# Altium PCB PCB1.PcbDoc
Units mm, origin at the board's own origin, x right, y up, seen from the top; angles counter-clockwise.
Board outline 91.5 x 139.5 mm, 2 copper layers (Top Layer, Bottom Layer); 69 components, 86 nets, 298 pads, 10 vias.
Unrouted connection lines stored in the file: 40.
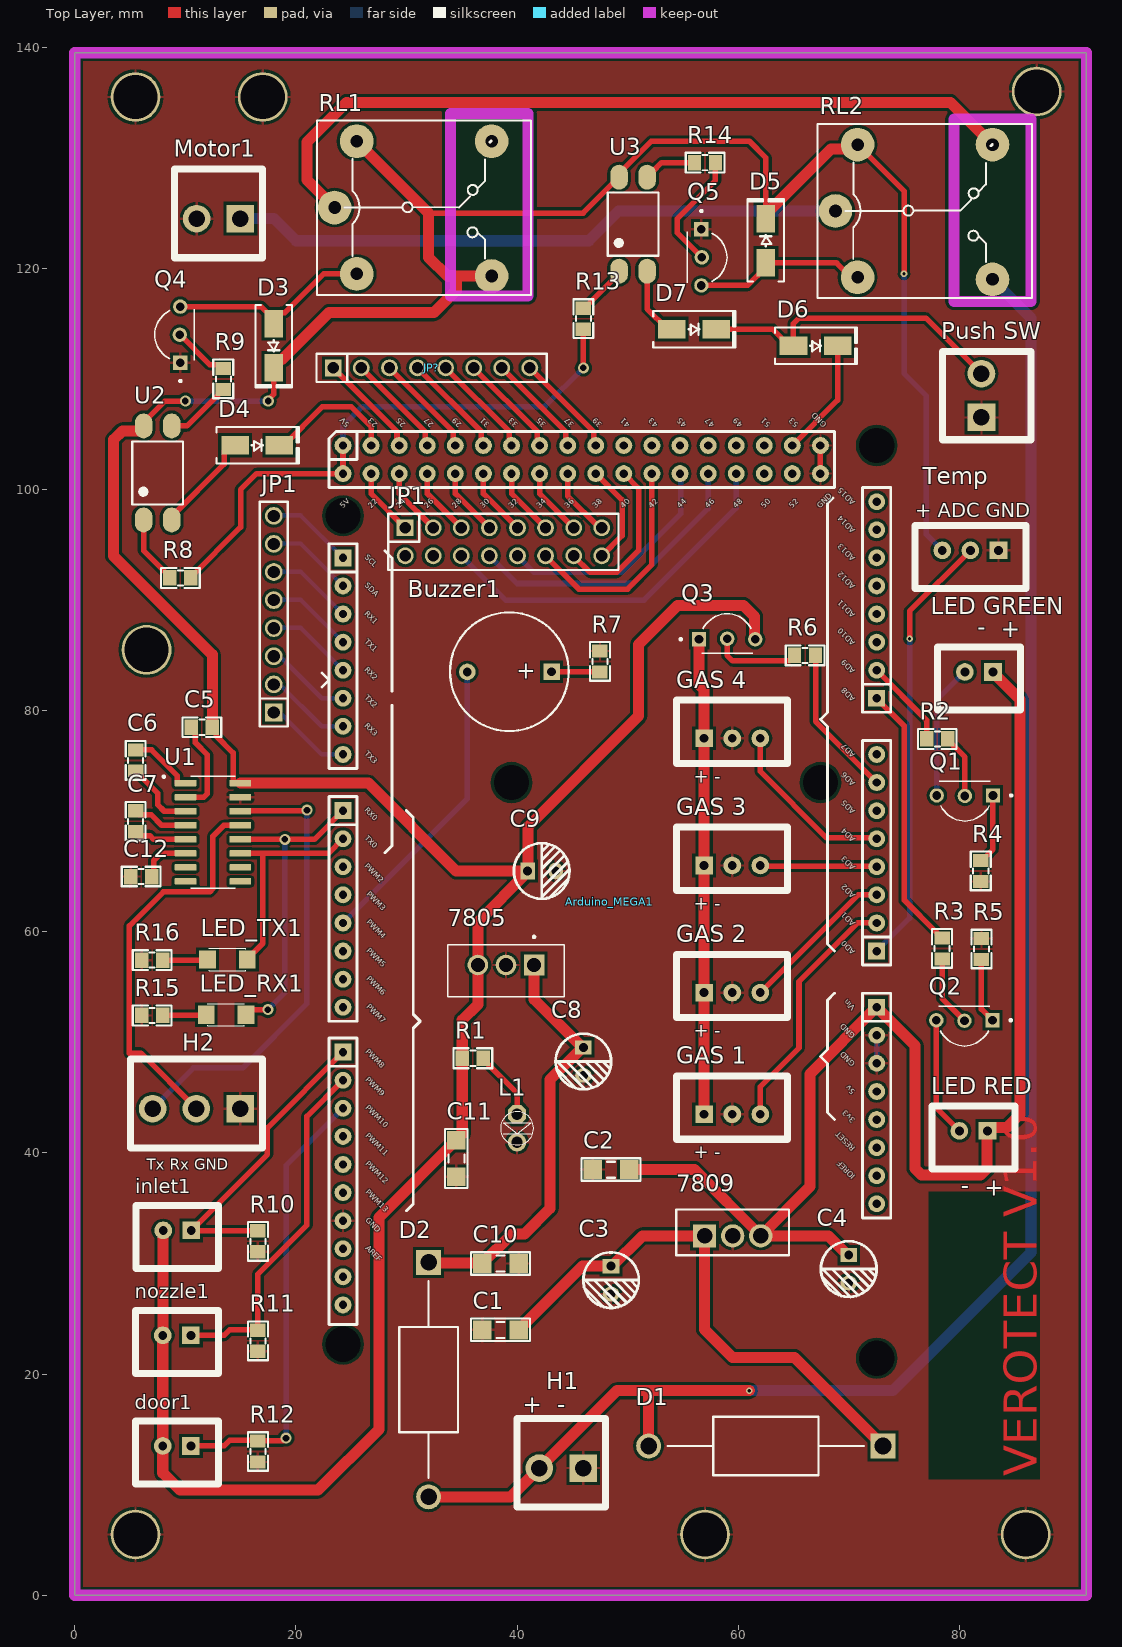
[diagram p0: Top Layer view]
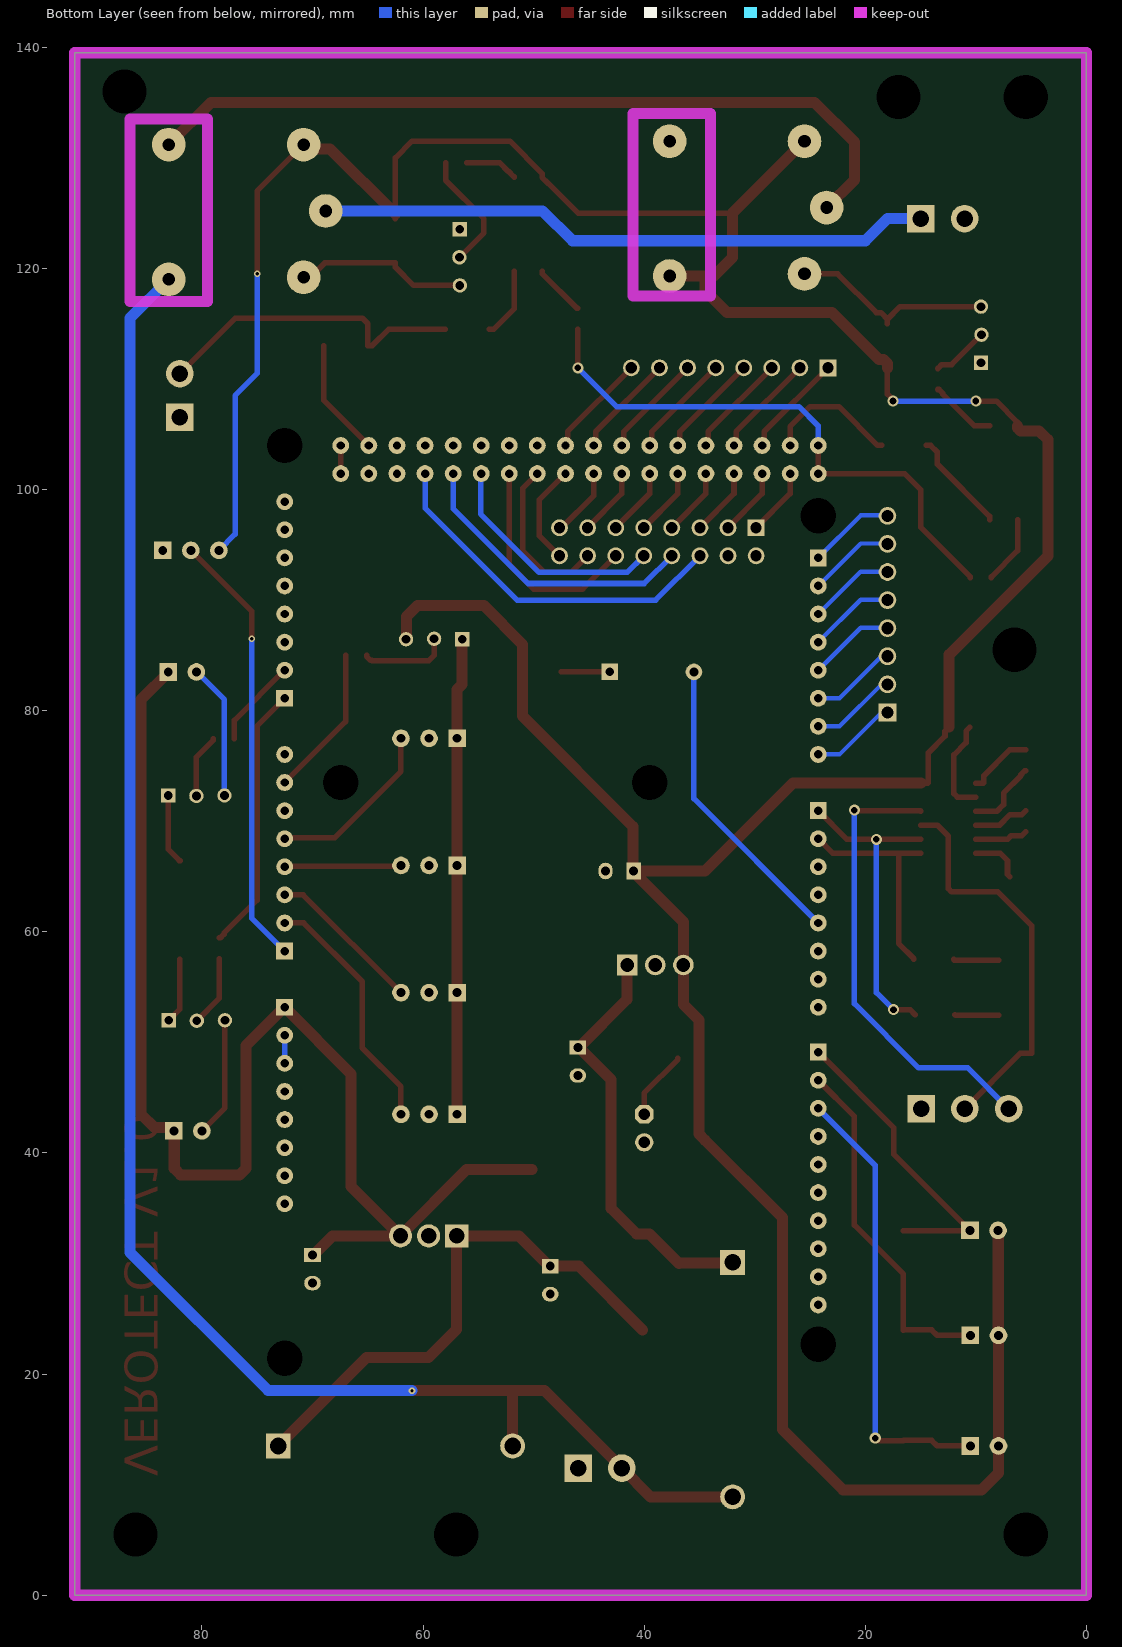
[diagram p1: Bottom Layer view, seen from below]

## Layer stack, top to bottom
Top Solder: solder mask 0.0102, Solder Resist, Dk 3.5
Top Layer: signal copper 0.0356
Dielectric 1: dielectric 0.32, FR-4, Dk 4.8
Bottom Layer: signal copper 0.0356
Bottom Solder: solder mask 0.0102, Solder Resist, Dk 3.5

## Board outline
0,0 91.5,0 91.5,139.5 0,139.5

## Design rules (kind name [scope] priority, off if disabled: settings)
Clearance [All] p1: gap=0.254 ignorepadtopadclearanceinfootprint=FALSE except(0: Arc-Hole Track-Hole SMDPad-Hole THPad-Hole Via-Hole Fill-Hole Poly-Hole Region-Hole Text-Hole)
PolygonConnect [All] p1: connectstyle=Relief reliefconductorwidth=0.254 reliefentries=4 polygonreliefangle="90 Angle" airgapwidth=0.254
RoutingVias [All] p1: holewidth=0.3 width=0.6 viastyle="Through Hole" minholewidth=0.3 minwidth=0.5 maxholewidth=0.6 maxwidth=1
SolderMaskExpansion [All] p1: expansion=0.102 istentingtop=FALSE
Width [All] p1: maxlimit=1 minlimit=0.3 preferedwidth=0.5
30 further rules are at their usual default settings.

## Components (designator, comment, footprint, x,y, rotation, side; value= is the part's Value field where it differs from the comment)
7805 "LM7805CT/NOPB" TO254P1054X470X1955-3 39,57 r180 top
7809 "LM7809CT" TO254P470X1016X1879-3P 56.96,32.5 r90 top
Arduino_MEGA1 "Arduino_MEGA?" ArduinoMEGA_ALL 75.06,7.46 r90 top
Buzzer1 "Coi Chip Speaker" "Coi Chip Speacker" 43.12,83.513 r180 top
C1 "104" "tu 1206" 38.5,24 r180 top
C2 "104" "tu 1206" 48.5,38.5 r180 top
C3 "100uF" "tu hoa 5mm" 48.5,28.5 r270 top
C4 "100uF" "tu hoa 5mm" 70,29.5 r270 top
C5 "105" "tu 0805" 11.5,78.5 r180 top
C6 "105" "tu 0805" 5.5,75.5 r270 top
C7 "105" "tu 0805" 5.5,70 r270 top
C8 "100uF" "tu hoa 5mm" 46,48.27 r270 top
C9 "100uF" "tu hoa 5mm" 42.23,65.5 r0 top
C10 "104" "tu 1206" 38.5,30 r0 top
C11 "104" "tu 1206" 34.5,39.5 r270 top
C12 "105" "tu 0805" 6,65 r0 top
D1 "1N5822" DIOAD2120W130L950D530P 62.5,13.5 r180 top
D2 "1N5822" DIOAD2120W130L950D530P 32,19.5 r270 top
D3 "M7" "DIODE SMA" 18,113 r270 top
D4 "M7" "DIODE SMA" 16.5,104 r0 top
D5 "M7" "DIODE SMA" 62.5,122.5 r90 top
D6 "M7" "DIODE SMA" 67,113 r0 top
D7 "M7" "DIODE SMA" 56,114.5 r0 top
door1 "Door" XH2.54M-2 10.5,13.5 r180 top
"GAS 1" "Gas Sensor 1" XH2.54M-3 56.92,43.5 r0 top
"GAS 2" "Gas Sensor 3" XH2.54M-3 56.92,54.5 r0 top
"GAS 3" "Gas Sensor 2" XH2.54M-3 56.92,66 r0 top
"GAS 4" "Gas Sensor 4" XH2.54M-3 56.92,77.5 r0 top
H1 "Power 12V" VH3.96M-2 44,11.5 r180 top
H2 "RS232 Out" VH3.96M-3 12.98,44 r180 top
inlet1 "Inlet" XH2.54M-2 10.54,33 r180 top
JP1 "JP 2x8 2.54" "JP 2x8 CT" 38.77,95.27 r0 top
JP1 "JP 1x8 2.54" "JP 1x8 DT" 18,79.84 r90 top
JP? "JP 1x8 2.54" "JP 1x8 CT" 23.38,111 r0 top
L1 "LED 3mm" LED-3MM-RED 40,43.5 r270 top
"LED GREEN" "Led GREEN" XH2.54M-2 83.04,83.5 r180 top
"LED RED" "Led RED" XH2.54M-2 82.54,42 r180 top
LED_RX1 "LED 0805" LED-1206-Red 15.5,52.5 r180 top
LED_TX1 "LED 0805" LED-1206-Red 15.607,57.5 r180 top
Motor1 "motor" VH3.96M-2 13,124.5 r180 top
nozzle1 "Nozzle" XH2.54M-2 10.5,23.5 r180 top
"Push SW" "Header 2P VH3.96 Duc Thang" VH3.96M-2 82,108.5 r90 top
Q1 "2N2222A" TO92254P470H750-3 80.5,70 r180 top
Q2 "2N2222A" TO92254P470H750-3 80.46,49.67 r180 top
Q3 "2N2222A" TO92254P470H750-3 59,88.786 r0 top
Q4 "2N2222A" TO92254P470H750-3 7.214,114 r90 top
Q5 "2N2222A" TO92254P470H750-3 59,121 r270 top
R1 "3.3k" "tro smd 0805" 36,48.5 r180 top
R2 "4.7k" "tro smd 0805" 78,77.5 r0 top
R3 "4.7k" "tro smd 0805" 78.5,58.5 r270 top
R4 "3.3k" "tro smd 0805" 82,65.5 r270 top
R5 "3.3k" "tro smd 0805" 81.939,58.446 r90 top
R6 "3.3k" "tro smd 0805" 66.054,84.939 r180 top
R7 "3.3k" "tro smd 0805" 47.561,84.454 r270 top
R8 "3.3k" "tro smd 0805" 9.546,92.061 r0 top
R9 "3.3k" "tro smd 0805" 13.5,110 r270 top
R10 "10k" "tro smd 0805" 16.5,32 r90 top
R11 "10k" "tro smd 0805" 16.5,23 r90 top
R12 "10k" "tro smd 0805" 16.5,13 r90 top
R13 "3.3k" "tro smd 0805" 46.061,115.454 r270 top
R14 "3.3k" "tro smd 0805" 57,129.5 r180 top
R15 "1k" "tro smd 0805" 7,52.5 r0 top
R16 "1k" "tro smd 0805" 7,57.5 r0 top
RL1 "Relay" "Relay 5 Chan SRD" 23.5,125.5 r0 top
RL2 "Relay" "Relay 5 Chan SRD" 68.8,125.192 r0 top
Temp "LM35 cam bien nhiet do" XH2.54M-3 83.54,94.5 r180 top (schematic designator "Temperature Header1")
U1 "MAX232ESE+" SOIC127P600X175-16N 12.5,69 r0 top
U2 "OPTO PC817 SMD" SOP4 7.5,101.5 r90 top value=PC817
U3 "OPTO PC817 SMD" SOP4 50.5,124 r90 top value=PC817

## Footprints (in the part's own frame and the unit in brackets; to place one, negate y for a bottom-side part, rotate by r counter-clockwise, add the part's x,y. Pads: shape width x height; smd on the part's side, far side on the other; paste and mask are expansions set on the pad)
ArduinoMEGA_ALL [mil]
  round 62.99 hole 125.98: 0(550,100) 0(600,2000) 0(2600,300) 0(2600,1400) 0(3550,2000) 0(3800,100)
  round 60 hole 30: 1(1100,100) 2(1200,100) 3(1300,100) 4(1400,100) 5(1500,100) 6(1600,100) 7(1700,100) 10(2100,100) 11(2200,100) 12(2300,100) 13(2400,100) 14(2500,100) 15(2600,100) 16(2700,100) 18(3000,100) 19(3100,100) 20(3200,100) 21(3300,100) 22(3400,100) 23(3500,100) 24(3600,100) 25(3700,300) 26(3800,300) 27(3700,400) 28(3800,400) 29(3700,500) 30(3800,500) 31(3700,600) 32(3800,600) 33(3700,700) 34(3800,700) 35(3700,800) 36(3800,800) 37(3700,900) 38(3800,900) 39(3700,1000) 40(3800,1000) 41(3700,1100) 42(3800,1100) 43(3700,1200) 44(3800,1200) 45(3700,1300) 46(3800,1300) 47(3700,1400) 48(3800,1400) 49(3700,1500) 50(3800,1500) 51(3700,1600) 52(3800,1600) 53(3700,1700) 54(3800,1700) 55(3700,1800) 56(3800,1800) 57(3700,1900) 58(3800,1900) 59(3700,2000) 60(3800,2000) 62(3300,2000) 63(3200,2000) 64(3100,2000) 65(3000,2000) 66(2900,2000) 67(2800,2000) 68(2700,2000) 70(2400,2000) 71(2300,2000) 72(2200,2000) 73(2100,2000) 74(2000,2000) 75(1900,2000) 76(1800,2000) 78(1540,2000) 79(1440,2000) 80(1340,2000) 81(1240,2000) 82(1140,2000) 83(1040,2000) 84(940,2000) 85(840,2000) 86(740,2000)
  rect 60x60 hole 30: 8(1800,100) 9(2000,100) 17(2900,100) 61(3400,2000) 69(2500,2000) 77(1640,2000)
  silkscreen extent 670,50 3850,2075, body extent 890,50 3850,2050, height 335
"Coi Chip Speacker" [mm]
  rect 1.5x1.5 hole 0.8: 1(0,0)
  round 1.5 hole 0.8: 2(7.62,0.013)
  silkscreen extent -1.55,-5.38 9.18,5.36, body extent -2.22,-6 13.24,6, height 4.5
DIOAD2120W130L950D530P [mm]
  round 2.25 hole 1.5: A(10.6,0)
  rect 2.25x2.25 / inner round 2.25 / far side rect 2.25x2.25 hole 1.5: C(-10.6,0)
  silkscreen extent -8.89,-2.65 8.89,2.65, body extent -10.61,-2.67 10.54,2.63, height 5.3
"DIODE SMA" [mm] "SMA"
  rect 2.5x1.7 smd: 1(-2,0) 2(2,0)
  silkscreen extent -3.68,-1.65 3.75,1.65, body extent -2.6,-1.37 2.6,1.37, height 2.4
"JP 1x8 CT" [mm] "8 row, straight, gold plating"
  rect 1.52x1.52 hole 1.02: 1(0,0)
  round 1.52 hole 1.02: 2(2.54,0) 3(5.08,0) 4(7.62,0) 5(10.16,0) 6(12.7,0) 7(15.24,0) 8(17.78,0)
  silkscreen extent -1.52,-1.27 19.3,1.27, body extent -1.52,-1.25 19.3,1.25, height 8.51
"JP 1x8 DT" [mm] "8 pins, 1 row, straight, gold plating"
  rect 1.6x1.6 hole 1.1: 1(0,0)
  round 1.6 hole 1.1: 2(2.54,0) 3(5.08,0) 4(7.62,0) 5(10.16,0) 6(12.7,0) 7(15.24,0) 8(17.78,0)
  silkscreen extent -1.27,-1.27 19.05,1.27, body extent -1.27,-1.27 19.05,1.27, height 8.54
"JP 2x8 CT" [mm] "16 pins, dual row, straight, gold plating"
  rect 1.52x1.52 hole 1.02: 1(-8.89,1.27)
  round 1.52 hole 1.02: 2(-6.35,1.27) 3(-3.81,1.27) 4(-1.27,1.27) 5(1.27,1.27) 6(3.81,1.27) 7(6.35,1.27) 8(8.89,1.27) 9(8.89,-1.27) 10(6.35,-1.27) 11(3.81,-1.27) 12(1.27,-1.27) 13(-1.27,-1.27) 14(-3.81,-1.27) 15(-6.35,-1.27) 16(-8.89,-1.27)
  silkscreen extent -10.41,-2.54 10.41,2.54, body extent -10.41,-2.54 10.41,2.54, height 8.51
LED-3MM-RED [mil]
  oct 65x65 hole 40: 1(0,0)
  round 65 hole 40: 2(100,0)
  silkscreen extent -9,-59 109,59, body extent -27,-77 117,80, height 181
LED-1206-Red [mil]
  rect 60x65 smd: 1(0,0) 2(142,0)
  silkscreen extent 6,-40 136,40, body extent 7,-31 133,32, height 43
"Relay 5 Chan SRD" [mil] "Relay SPDT, 5 pin, 10A,W 650mil, L 800mil, H 800mil"
  round 120 hole 45: 1(0,0) 2(559.06,236.22) 3(559.06,-243.78) 4(78.74,-236.22) 5(78.74,236.22)
  silkscreen extent -63,-311 700,310, body extent -55,-306 697,304, height 602
SOIC127P600X175-16N [mm]
  rrect25% 1.97x0.59 smd: 1(-2.475,4.445) 2(-2.475,3.175) 3(-2.475,1.905) 4(-2.475,0.635) 5(-2.475,-0.635) 6(-2.475,-1.905) 7(-2.475,-3.175) 8(-2.475,-4.445) 9(2.475,-4.445) 10(2.475,-3.175) 11(2.475,-1.905) 12(2.475,-0.635) 13(2.475,0.635) 14(2.475,1.905) 15(2.475,3.175) 16(2.475,4.445)
  silkscreen extent -4.54,-5.06 2,5.13, body extent -3,-4.95 3,4.95, height 1.75
SOP4 [mm]
  oval 2.25x1.6 smd: 1(-4.25,1.27) 2(-4.25,-1.27) 3(4.25,-1.27) 4(4.25,1.27)
  silkscreen extent -2.85,-2.3 2.85,2.3, body extent -4.67,-2.29 4.93,2.31, height 3.6
TO254P470X1016X1879-3P [mm]
  rect 2.1x2.1 hole 1.4: 1(0,0)
  round 2.1 hole 1.4: 2(0,-2.54) 3(0,-5.08)
  silkscreen extent -1.75,-7.64 2.39,2.56, body extent -1.91,-7.62 2.45,2.54, height 20.4
TO254P1054X470X1955-3 [mm]
  rect 1.86x1.86 hole 1.24: 1(-2.54,0)
  round 1.86 hole 1.24: 2(0,0) 3(2.54,0)
  silkscreen extent -5.27,-2.64 5.27,2.86, body extent -4.95,-1.65 5.21,2.54, height 22.86
TO92254P470H750-3 [mm]
  rect 1.298x1.298 / inner round 1.298 / far side rect 1.298x1.298 hole 0.79: 1(-2.54,-2.33)
  round 1.298 hole 0.79: 2(0,-2.286) 3(2.54,-2.33)
  silkscreen extent -4.29,-3.6 2.3,0, body extent -2.74,-3.47 2.74,0.13, height 7.65
"tro smd 0805" [mm]
  rect 1.2x1.4 smd: 1(-0.946,-0.061) 2(0.954,-0.061)
  silkscreen extent -1.75,-0.97 1.75,0.84, body extent -1.56,-0.76 1.44,0.64, height 0.53
"tu 0805" [mm] "Compoment SMD 80x50mil"
  rect 1.2x1.4 smd: 1(-0.946,-0.003) 2(0.954,-0.003)
  silkscreen extent -1.75,-0.89 1.75,0.89, body extent -1.01,-0.64 1.01,0.63, height 0.61
"tu 1206" [mm]
  rect 1.7x1.7 smd: 1(-1.65,0) 2(1.65,0)
  silkscreen extent -2.67,-1.02 2.67,1.02, body extent -1.57,-0.8 1.63,0.8, height 0.94
"tu hoa 5mm" [mm]
  rect 1.3x1.5 hole 0.8: 1(-1.27,0)
  oval 1.3x1.5 hole 0.8: 2(1.27,0)
  silkscreen extent -2.51,-2.51 2.51,2.51, body extent -3.12,-3.18 3.23,3.18, height 14.55
VH3.96M-2 [mm]
  rect 2.5x2.5 hole 1.5: 1(-1.98,0)
  round 2.5 hole 1.5: 2(1.98,0)
  silkscreen extent -4,-4.5 4,3.54, body extent -4.08,-4.49 3.96,3.88, height 10.26
VH3.96M-3 [mm]
  rect 2.5x2.5 hole 1.5: 1(-1.98,0)
  round 2.5 hole 1.5: 2(1.98,0) 3(5.94,0)
  silkscreen extent -4,-4.5 7.96,3.54, body extent -4.08,-4.49 7.92,3.88, height 10.26
XH2.54M-2 [mm]
  rect 1.6x1.6 hole 0.8: 1(0,0)
  round 1.6 hole 0.8: 2(2.54,0)
  silkscreen extent -2.48,-2.26 5.02,3.46, body extent -2.48,-2.26 5.02,3.48, height 6.91
XH2.54M-3 [mm]
  rect 1.6x1.6 hole 0.8: 1(0,0)
  round 1.6 hole 0.8: 2(2.54,0) 3(5.08,0)
  silkscreen extent -2.48,-2.26 7.56,3.46, body extent -2.48,-2.26 7.56,3.48, height 6.91

## Part data
7805: Package=None, Availability=Unavailable, MP=LM7805CT/NOPB, Price=None
7809: "Linear Voltage Regulator IC 1 Output 1A TO-220-3", Package="TO-220-3 Fujitsu", Availability=Unavailable, MF=Fujitsu, MP=LM7809C, Price=None, SnapEDA_Link=https://www.snapeda.com/parts/LM7809C/Fujitsu/view-part/1233224/?ref=snap
Arduino_MEGA1: library part Arduino_MEGA
Buzzer1: "Còi chip"
C1 C2 C10 C11: library part "Tu 1206 104 50V 20%", "Dán", Chung_Loai=Dán, Don_Vi=Con, Ma_Hang=MH004544, So_Chan=2, Ten_Linh_Kien="Tụ 1206 104-0.1uF 20% 50V"
C3 C4 C8 C9: library part "Tu Hoa 100uF 25V 6x11", "Cắm", Chung_Loai=Cắm, Don_Vi=Con, Ma_Hang=MH001351, So_Chan=2, Ten_Linh_Kien="Tụ Hóa 100uF 25V 6x11MM"
C5 C6 C7 C12: library part "Tu 0805 105 50V 10%", "Dán", Chung_Loai=Dán, Don_Vi=Con, Ma_Hang=MH004552, So_Chan=2, Ten_Linh_Kien="Tụ 0805 105-1uF 10% 50V"
D1 D2: "Diode Schottky 40 V 3A Through Hole DO-201AD", Package="DO-201 STMicroelectronics", Availability="In Stock", Check_prices=https://www.snapeda.com/parts/1N5822/STMicroelectronics/view-part/?ref=eda, MF=STMicroelectronics, MP=1N5822, Price=None, Purchase-URL=https://pricing.snapeda.com/search/part/1N5822/?ref=eda, SnapEDA_Link=https://www.snapeda.com/parts/1N5822/STMicroelectronics/view-part/?ref=snap
D3 D4 D5 D6 D7: library part "Diode M7 ( 4007 )", "Dán", Chung_Loai=Dán, Don_Vi=Con, Ma_Hang=MH000944, Ten_Linh_Kien="Diode M7 1N4007 SMD 1A 1000V"
door1 inlet1 "LED GREEN" "LED RED" nozzle1: library part "Header 2P 2.54 Duc Thang", "Cắm", Chung_Loai=Cắm, Don_Vi=Con, Ma_Hang=MH001283, Ten_Linh_Kien="Header 2P XH2.54-2P Đực Thẳng"
"GAS 1" "GAS 2" "GAS 3" "GAS 4" Temp: library part "Header 3P 2.54 Duc Thang", "Cắm", Chung_Loai=Cắm, Don_Vi=Con, Ma_Hang=MH001292, Ten_Linh_Kien="Header 3P XH2.54-3P Đực Thẳng"
H1 Motor1: library part "Header 2P VH3.96 Duc Thang", "Cắm", Chung_Loai=Cắm, Don_Vi=Con, Ma_Hang=MH001283, Ten_Linh_Kien="Header 2P XH2.54-2P Đực Thẳng"
H2: library part "Header 3P VH3.96 Duc Thang", "Cắm", Chung_Loai=Cắm, Don_Vi=Con, Ma_Hang=MH001292, Ten_Linh_Kien="Header 3P XH2.54-3P Đực Thẳng"
JP1: library part "JP 2x8 2.54 Cai Thang", "Cắm", Chung_Loai=Cắm, Don_Vi=Con, Ma_Hang=MH008647, Ten_Linh_Kien="Jump Đôi Cái 2.54MM 2x20P Thẳng"
JP1: library part "JP 1x8 2.54 Duc Thang", "Cắm", Chung_Loai=Cắm, Don_Vi=Con, Ma_Hang=MH000903, Ten_Linh_Kien="Jump Đơn Đực 2.54MM 1x40P Thẳng 11MM"
JP?: library part "JP 1x8 2.54 Cai Thang", "Cắm", Chung_Loai=Cắm, Don_Vi=Con, Ma_Hang=MH004006, Ten_Linh_Kien="Jump Đơn Cái 2.54MM 1x20P Thẳng"
L1: library part "LED 3mm Do", "Cắm", Chung_Loai=Cắm, Don_Vi=Con, Ma_Hang=MH003892, Ten_Linh_Kien="Led 3MM Phủ Đỏ (10c)"
LED_RX1 LED_TX1: library part "LED 1206 Do", "Dán", Chung_Loai=Dán, Don_Vi=Con, Ma_Hang=MH002334, Ten_Linh_Kien="LED1206 Màu Đỏ (Red)"
"Push SW": "Cắm", Chung_Loai=Cắm, Don_Vi=Con, Ma_Hang=MH001283, Ten_Linh_Kien="Header 2P XH2.54-2P Đực Thẳng"
Q1 Q2 Q3 Q4 Q5: "Bipolar (BJT) Transistor NPN 40 V 600 mA 250MHz 625 mW Through Hole TO-92", Package="TO-92-3 Diotec", Availability="In Stock", Check_prices=https://www.snapeda.com/parts/2N2222A/Diotec/view-part/?ref=eda, MF="Diotec Semiconductor", MP=2N2222A, Price=None, Purchase-URL=https://pricing.snapeda.com/search/part/2N2222A/?ref=eda, SnapEDA_Link=https://www.snapeda.com/parts/2N2222A/Diotec/view-part/?ref=snap
R1 R4 R5 R6 R7 R8 R9 R13 R14: library part "Tro 0805 1% 3.3k", "Dán", Chung_Loai=Dán, Don_Vi=Con, Ma_Hang=MH005472, So_Chan=2, Ten_Linh_Kien="Trở 0805 1% 3.3k"
R2 R3: library part "Tro 0805 5% 4.7k", "Dán", Chung_Loai=Dán, Don_Vi=Con, Ma_Hang=MH005307, So_Chan=2, Ten_Linh_Kien="Trở 0805 5% 4.7k"
R10 R11 R12: library part "Tro 0805 5% 10k", "Dán", Chung_Loai=Dán, Don_Vi=Con, Ma_Hang=MH005239, So_Chan=2, Ten_Linh_Kien="Trở 0805 5% 10k"
R15 R16: library part "Tro 0805 5% 1k", "Dán", Chung_Loai=Dán, Don_Vi=Con, Ma_Hang=MH005234, So_Chan=2, Ten_Linh_Kien="Trở 0805 5% 1k"
RL1 RL2: library part "Relay 5 Chan SRD", "Relay 5 Chan", Ma_Hang=MH009374, Ten="Relay 5V10A SRD-05VDC-SL-C Chính Hãng"
U1: "2/2 Transceiver Full RS232 16-SOIC", Package="SOIC-16 Maxim", Availability=Warning, Check_prices=https://www.snapeda.com/parts/MAX232ESE+/Maxim%20Integrated/view-part/7706/?ref=eda, MF="Maxim Integrated", MP=MAX232ESE+, Price=None, Purchase-URL=https://pricing.snapeda.com/search/part/MAX232ESE+/?ref=eda, SnapEDA_Link=https://www.snapeda.com/parts/MAX232ESE+/Maxim%20Integrated/view-part/7706/?ref=snap
U2 U3: "Single Opto"

## Free pads (board coordinates)
  round 4.5 / inner round 1.298 / far side rect 1.298x1.298 hole 4: 4(5.5,5.5) 4(5.5,135.5) 4(6.5,85.5) 4(17,135.5) 4(57,5.5) 4(86,5.5) 4(87,136)

## Via types
v1: diameter 1, hole 0.6, Top Layer to Bottom Layer, 7 vias
v2: diameter 0.6, hole 0.3, Top Layer to Bottom Layer, 3 vias

## Nets (pads, with @x,y where several pads share a name; then routed paths per layer and width w, separated by ;. In a path a pad name is that pad's centre, name@x,y a point inside that pad or via, vN(x,y) a via of type N, cw(c..) or ccw(c..) an arc to the next point about the centre after c; other vN are vias at no path point)
"5V MCU": Arduino_MEGA1.59 Arduino_MEGA1.60 R8.2 R13.2 | length 51.5
  Top Layer w0.5: R8.2 10.5,92.1 15,96.6 15,100 16.44,101.44 Arduino_MEGA1.59 Arduino_MEGA1.60 ; v1(46,111) R13.2
  Bottom Layer w0.5: Arduino_MEGA1.60 24.26,105.76 26,107.5 42.5,107.5 v1(46,111)
+5: 7805.3 C5.1 C9.1 C11.1 D3.2 D5.2 door1.2 inlet1.2 nozzle1.2 Q3.3 R1.2 RL1.3 RL1.5 RL2.5 Temp.3 U1.16 U2.4 U3.4 | length 354.8
  Top Layer w0.5: U2.4 6.23,106.075 8.155,108 v1(10,108) ; C5.1 12.796,78.153 12.796,77.704 14.314,76.186 14.314,73.49 14.359,73.445 U1.16 ; v1(17.5,108) 17.5,108.135 18,108.635 D3.2 ; 32,125 45.98,125 48.694,127.714 48.722,127.714 49.23,128.223 U3.4 49.23,128.575 52.155,131.5 61,131.5 62.5,130 62.5,124.9 D5.2 ; RL2.5 75,126.992 v2(75,119.5)
  Top Layer w1: U2.4 6.23,105.587 5.953,105.31 4.31,105.31 3.5,104.5 3.5,94 12.446,85.054 C5.1 ; inlet1.2 7.98,32.98 7.98,23.52 nozzle1.2 door1.2 7.96,11.04 9.5,9.5 22,9.5 27.5,15 27.5,34.15 C11.1 35.046,41.696 R1.2 35.046,52.007 36.46,53.421 7805.3 36.46,60.9 40.96,65.4 C9.1 ; U1.16 26.555,73.445 34.5,65.5 C9.1 ; D3.2 18,111.4 18.35,111.75 18.75,111.75 23,116 32.5,116 34.5,118 34.5,119.308 ; RL1.5 32,125 32,121 33.692,119.308 34.5,119.308 ; RL1.3 34.5,119.308 ; Q3.3 61.483,86.513 61.483,88.517 60.5,89.5 54.5,89.5 51,86 51,79.5 41,69.5 41,65.54 C9.1 ; D5.2@62.5,124.9 68.4,130.8 70.408,130.8 RL2.5
  Bottom Layer w0.5: v1(10,108) v1(17.5,108) ; v2(75,119.5) 75,110.5 77,108.5 77,95.96 Temp.3
+12: D1.A D2.A H1.2 RL2.3 | length 158.1
  Top Layer w1: D2.A 39.42,8.9 H1.2 49.02,18.5 52,18.5 ; D1.A 51.9,18.4 52,18.5 ; v2(61,18.5) 52,18.5
  Bottom Layer w1: v2(61,18.5) 74,18.5 86.5,31 86.5,115.5 RL2.3
"adc gas 1": "GAS 1.3" Arduino_MEGA1.10 | length 22.7
  Top Layer w0.5: 62,43.5 62,46 65.5,49.5 65.5,55.5 70.8,60.8 Arduino_MEGA1.10
"adc gas 2": "GAS 2.3" Arduino_MEGA1.11 | length 14.2
  Top Layer w0.5: 62,54.5 70.84,63.34 Arduino_MEGA1.11
"adc gas 3": "GAS 3.3" Arduino_MEGA1.12 | length 10.6
  Top Layer w0.5: 62,66 62.06,65.94 72.46,65.94 Arduino_MEGA1.12
"adc gas 4": "GAS 4.3" Arduino_MEGA1.13 | length 16
  Top Layer w0.5: 62,77.5 62,74.5 68,68.5 72.44,68.5 Arduino_MEGA1.13
"adc nhiet do": Arduino_MEGA1.9 Temp.2 | length 39.8
  Top Layer w0.5: v2(75.5,86.5) 75.5,89 Temp.2
  Bottom Layer w0.5: Arduino_MEGA1.9 75.5,61.24 v2(75.5,86.5)
"control 5v or 12v": Arduino_MEGA1.28 D6.2 | length 10.7
  Top Layer w0.5: Arduino_MEGA1.28 69,108.08 D6.2
door_pin: Arduino_MEGA1.79 door1.1 R12.2 | length 40.9
  Top Layer w0.5: door1.1 13.5,13.5 14,14 16.515,14 R12.2 18.848,13.954 v1(19.107,14.213)
  Bottom Layer w0.5: v1(19.107,14.213) 19.107,38.883 Arduino_MEGA1.79
GND: 7805.2 7809.2 "GAS 1.2" "GAS 2.2" "GAS 3.2" "GAS 4.2" "Push SW.1" Arduino_MEGA1.6 Arduino_MEGA1.7 Arduino_MEGA1.25 Arduino_MEGA1.26 Arduino_MEGA1.83 C1.2 C2.2 C3.2 C4.2 C8.2 C9.2 C10.2 C11.2 C12.1 H1.1 H2.1 L1.2 Motor1.2 pad.4@5.5,5.5 pad.4@5.5,135.5 pad.4@17,135.5 pad.4@57,5.5 pad.4@86,5.5 pad.4@87,136 Q4.1 Q5.1 R4.2 R5.2 R7.1 R10.1 R11.1 R12.1 R15.1 R16.1 Temp.1 U1.15 | length 5.1
  Top Layer w0.5: Arduino_MEGA1.25 Arduino_MEGA1.26
  Bottom Layer w0.5: Arduino_MEGA1.6 Arduino_MEGA1.7
inlet_pin: Arduino_MEGA1.77 inlet1.1 R10.2 | length 27.8
  Top Layer w0.5: R10.2 10.586,32.954 inlet1.1 17.419,39.879 17.419,42.275 Arduino_MEGA1.77
Net7805_1: 7805.1 C8.1 C10.1 D2.C | length 38.2
  Top Layer w1: D2.C 32.05,30.05 36.8,30.05 C10.1 39.525,32.675 40.675,32.675 43,35 43,46.64 C8.1@45.9,49.54 ; 7805.1 41.54,53.9 C8.1@45.9,49.54 ; C8.1 C8.1@45.9,49.54
Net7809_1: 7809.1 C1.1 C3.1 D1.C | length 49.3
  Top Layer w1: C1.1 45.92,29.77 C3.1 48.6,29.77 51.33,32.5 52,32.5 7809.1 56.96,24.04 59.5,21.5 65.1,21.5 D1.C
NetArduino_MEGA1_17: Arduino_MEGA1.17 R3.1 | length 24.2
  Top Layer w0.5: Arduino_MEGA1.17 75.016,78.624 75.016,62.869 77.989,59.896 77.989,59.796 78.339,59.446 R3.1
NetArduino_MEGA1_18: Arduino_MEGA1.18 R2.1 | length 8.1
  Top Layer w0.5: Arduino_MEGA1.18 77.054,79.126 R2.1
NetArduino_MEGA1_61: Arduino_MEGA1.61 JP1.8@18,97.62 | length 7.4
  Bottom Layer w0.4: JP1.8@18.5,97.66 20.42,97.66 Arduino_MEGA1.61
NetArduino_MEGA1_62: Arduino_MEGA1.62 JP1.7@18,95.08 | length 7.4
  Bottom Layer w0.4: JP1.7@18.5,95.12 20.42,95.12 Arduino_MEGA1.62
NetArduino_MEGA1_63: Arduino_MEGA1.63 JP1.6@18,92.54 | length 7.4
  Bottom Layer w0.4: JP1.6@18.5,92.58 20.42,92.58 Arduino_MEGA1.63
NetArduino_MEGA1_64: Arduino_MEGA1.64 JP1.5@18,90 | length 7.4
  Bottom Layer w0.4: JP1.5@18.5,90.04 20.42,90.04 Arduino_MEGA1.64
NetArduino_MEGA1_65: Arduino_MEGA1.65 JP1.4@18,87.46 | length 7.4
  Bottom Layer w0.4: JP1.4@18.5,87.5 20.42,87.5 Arduino_MEGA1.65
NetArduino_MEGA1_66: Arduino_MEGA1.66 JP1.3@18,84.92 | length 7.4
  Bottom Layer w0.4: JP1.3@18.5,84.96 22.34,81.12 Arduino_MEGA1.66
NetArduino_MEGA1_67: Arduino_MEGA1.67 JP1.2@18,82.38 | length 7.4
  Bottom Layer w0.4: JP1.2@18.5,82.42 22.34,78.58 Arduino_MEGA1.67
NetArduino_MEGA1_68: Arduino_MEGA1.68 JP1.1@18,79.84 | length 7.4
  Bottom Layer w0.4: JP1.1@18.5,79.88 22.34,76.04 Arduino_MEGA1.68
NetArduino_MEGA1_73: Arduino_MEGA1.73 Buzzer1.2 | length 27.4
  Bottom Layer w0.5: Arduino_MEGA1.73 35.5,72.04 Buzzer1.2
NetBuzzer1_1: Buzzer1.1 R7.2 | length 4.4
  Top Layer w0.5: Buzzer1.1 43.133,83.5 R7.2
NetC5_2: C5.2 U1.2 | length 8.7
  Top Layer w0.5: U1.2 11.675,72.175 12,72.5 12,76 10.896,77.104 10.896,78.153 C5.2
NetC6_1: C6.1 U1.1 | length 6.1
  Top Layer w0.5: C6.1 6.947,76.446 9.29,74.102 9.29,73.49 9.335,73.445 U1.1
NetC6_2: C6.2 U1.3 | length 6.7
  Top Layer w0.5: C6.2 5.597,74.546 5.947,74.196 5.947,74.096 7.5,72.542 7.5,71.5 8.095,70.905 U1.3
NetC7_1: C7.1 U1.4 | length 5.1
  Top Layer w0.5: C7.1 5.847,70.596 6.904,70.596 7.865,69.635 U1.4
NetC7_2: C7.2 U1.5 | length 4.8
  Top Layer w0.5: C7.2 5.847,68.696 6.804,68.696 7.135,68.365 U1.5
NetC12_2: C12.2 U1.6 | length 4.7
  Top Layer w0.5: C12.2 7.145,65.187 7.145,66.447 7.793,67.095 U1.6
NetD3_1: D3.1 Q4.3 RL1.4 | length 18.5
  Top Layer w0.5: Q4.3 16.86,116.54 D3.1@18,115.4 ; D3.1 D3.1@18,115.4 ; RL1.4 22.5,119.5 19,116 18.6,116 D3.1@18,115.4
NetD4_1: D4.1 U2.2 | length 9.4
  Top Layer w0.5: U2.2 8.77,97.575 13.5,102.305 13.5,103.4 14.1,104 D4.1
NetD5_1: D5.1 Q5.3 RL2.4 | length 15.8
  Top Layer w0.5: Q5.3 60.86,118.46 62.5,120.1 D5.1 68.892,120.5 70.2,119.192 RL2.4
NetD6_1: "Push SW.2" D6.1 D7.2 | length 28.9
  Top Layer w0.5: D7.2 63.1,114.5 64.6,113 D6.1 65,115 65.5,115.5 76.98,115.5 82,110.48
NetD7_1: D7.1 U3.2 | length 6.4
  Top Layer w0.5: U3.2 51.77,116.33 53.6,114.5 D7.1
"NetGAS 1_1": "GAS 1.1" "GAS 2.1" "GAS 3.1" "GAS 4.1" Q3.1 | length 43.1
  Top Layer w1: Q3.1 56.46,82.358 56.92,81.898 56.92,77.5 56.92,66 56.92,54.5 56.92,43.5
NetH2_2: H2.2 U1.13 | length 36.2
  Top Layer w0.5: H2.2 5.974,49.026 4.934,49.026 4.934,60.544 8.007,63.618 12.207,63.618 12.5,63.911 12.5,68.642 13.493,69.635 U1.13
NetH2_3: H2.3 U1.14 | length 41.5
  Top Layer w0.5: U1.14 15.02,70.95 20.95,70.95 v1(21,71)
  Bottom Layer w0.5: H2.3 10.731,47.691 15.191,47.691 21,53.5 v1(21,71)
NetL1_1: L1.1 R1.1 | length 6.3
  Top Layer w0.5: R1.1 36.946,48.461 40,45.406 L1.1
"NetLED GREEN_2": "LED GREEN.2" Q1.3 | length 12.2
  Bottom Layer w0.5: Q1.3 77.96,81 80.46,83.5
"NetLED RED_2": "LED RED.2" Q2.3 | length 10.9
  Top Layer w0.5: Q2.3 77.92,44.08 80,42
NetLED_RX1_2: LED_RX1.2 R15.2 | length 4
  Top Layer w0.5: R15.2 11.832,52.439 LED_RX1.2
NetLED_TX1_2: LED_TX1.2 R16.2 | length 4.1
  Top Layer w0.5: R16.2 11.939,57.439 LED_TX1.2
NetMotor1_1: Motor1.1 RL2.1 | length 56.2
  Bottom Layer w0.5: RL2.1@68.492,125.5 RL2.1
  Bottom Layer w1: Motor1.1 18,124.5 20,122.5 46.5,122.5 49.192,125.192 RL2.1
NetQ1_1: Q1.1 R4.1 | length 6.4
  Top Layer w0.5: R4.1 82.039,66.446 83.04,67.446 Q1.1
NetQ1_2: Q1.2 R2.2 | length 5.8
  Top Layer w0.5: R2.2 78.954,77.339 80.5,75.794 Q1.2
NetQ2_1: Q2.1 R5.1 | length 5.9
  Top Layer w0.5: R5.1 82,53 Q2.1
NetQ2_2: Q2.2 R3.2 | length 6.4
  Top Layer w0.5: R3.2 78.439,53.977 Q2.2
NetQ3_2: Q3.2 R6.2 | length 8.1
  Top Layer w0.5: Q3.2 59,85 59.5,84.5 64.6,84.5 64.65,84.55 64.75,84.55 65.1,84.9 R6.2
NetQ4_2: Q4.2 R9.1 | length 5.2
  Top Layer w0.5: Q4.2 12.204,111.296 13.089,111.296 R9.1
NetQ5_2: Q5.2 R14.1 | length 10.9
  Top Layer w0.5: Q5.2 54.5,123.214 54.5,124.5 57.946,127.946 R14.1
NetR8_1: R8.1 U2.1 | length 6.2
  Top Layer w0.5: U2.1 6.23,94.47 8.6,92.1 R8.1
NetR9_2: R9.2 U2.3 | length 6.1
  Top Layer w0.5: U2.3 10.144,105.75 12.989,108.596 12.989,108.696 13.339,109.046 R9.2
NetR13_1: R13.1 U3.1 | length 4.7
  Top Layer w0.5: R13.1 46.1,116.4 49.23,119.53 U3.1
NetR14_2: R14.2 U3.3 | length 4.8
  Top Layer w0.5: U3.3 51.77,128.277 52.278,128.785 52.305,128.785 53.081,129.561 R14.2
NetRL1_1: RL1.1 RL2.2 | length 72
  Top Layer w1: RL1.1 21,128 21,131.414 24.586,135 79.192,135 RL2.2
nozzle_pin: Arduino_MEGA1.78 nozzle1.1 R11.2 | length 32.1
  Top Layer w0.5: nozzle1.1 13.5,23.5 14,24 16.515,24 R11.2 16.561,29.042 21,33.481 21,43.316 Arduino_MEGA1.78
"on off gas sensor": Arduino_MEGA1.15 R6.1 | length 13.8
  Top Layer w0.5: R6.1 67,79.02 Arduino_MEGA1.15
"on off motor": Arduino_MEGA1.58 D4.2 | length 12.2
  Top Layer w0.5: D4.2 18.9,104 22.4,107.5 25,107.5 26.8,105.7 Arduino_MEGA1.58
"pin 1": Arduino_MEGA1.57 JP1.1@29.88,96.54 | length 6.2
  Top Layer w0.5: Arduino_MEGA1.57 26.8,99.62 JP1.1@29.88,96.54
"pin 2": Arduino_MEGA1.55 JP1.2@32.42,96.54 | length 6.2
  Top Layer w0.5: Arduino_MEGA1.55 29.34,99.62 JP1.2@32.42,96.54
"pin 3": Arduino_MEGA1.53 JP1.3@34.96,96.54 | length 6.2
  Top Layer w0.5: Arduino_MEGA1.53 31.88,99.62 JP1.3@34.96,96.54
"pin 4": Arduino_MEGA1.51 JP1.4@37.5,96.54 | length 6.2
  Top Layer w0.5: Arduino_MEGA1.51 34.42,99.62 JP1.4@37.5,96.54
"pin 5": Arduino_MEGA1.49 JP1.5@40.04,96.54 | length 6.2
  Top Layer w0.5: Arduino_MEGA1.49 36.96,99.62 JP1.5@40.04,96.54
"pin 6": Arduino_MEGA1.47 JP1.6@42.58,96.54 | length 6.2
  Top Layer w0.5: Arduino_MEGA1.47 39.5,99.62 JP1.6@42.58,96.54
"pin 7": Arduino_MEGA1.45 JP1.7@45.12,96.54 | length 6.2
  Top Layer w0.5: Arduino_MEGA1.45 42.04,99.62 JP1.7@45.12,96.54
"pin 8": Arduino_MEGA1.43 JP1.8@47.66,96.54 | length 6.3
  Top Layer w0.5: Arduino_MEGA1.43 44.58,99.42 47.46,96.54 JP1.8@47.66,96.54
"pin 9": Arduino_MEGA1.41 JP1.9 | length 9.2
  Top Layer w0.5: Arduino_MEGA1.41 49.5,99.06 49.5,95.84 JP1.9
"pin 10": Arduino_MEGA1.39 JP1.10 | length 14.8
  Top Layer w0.5: JP1.10 46.62,92.5 49,92.5 51,94.5 51,100.1 Arduino_MEGA1.39
"pin 11": Arduino_MEGA1.37 JP1.11 | length 20
  Top Layer w0.5: JP1.11 45.58,91 50,91 52.2,93.2 Arduino_MEGA1.37
"pin 12": Arduino_MEGA1.35 JP1.12 | length 21.2
  Bottom Layer w0.5: JP1.12 41.54,92.5 49.5,92.5 54.793,97.793 54.793,101.387 Arduino_MEGA1.35
"pin 13": Arduino_MEGA1.33 JP1.13 | length 26.8
  Bottom Layer w0.5: JP1.13 40,91.5 50.5,91.5 57.28,98.28 Arduino_MEGA1.33
"pin 14": Arduino_MEGA1.31 JP1.14 | length 33.1
  Bottom Layer w0.5: JP1.14 38.96,90 51.5,90 59.82,98.32 Arduino_MEGA1.31
"pin 21": Arduino_MEGA1.56 JP?.1 | length 9.5
  Top Layer w0.5: JP?.1 29.144,105.236 29.144,104.176 Arduino_MEGA1.56
"pin 22": Arduino_MEGA1.54 JP?.2 | length 9.5
  Top Layer w0.5: JP?.2 31.684,105.236 31.684,104.176 Arduino_MEGA1.54
"pin 23": Arduino_MEGA1.52 JP?.3 | length 9.5
  Top Layer w0.5: JP?.3 34.224,105.236 34.224,104.176 Arduino_MEGA1.52
"pin 24": Arduino_MEGA1.50 JP?.4 | length 9.5
  Top Layer w0.5: JP?.4 36.764,105.236 36.764,104.176 Arduino_MEGA1.50
"pin 25": Arduino_MEGA1.48 JP?.5 | length 9.5
  Top Layer w0.5: JP?.5 39.304,105.236 39.304,104.176 Arduino_MEGA1.48
"pin 26": Arduino_MEGA1.46 JP?.6 | length 9.5
  Top Layer w0.5: JP?.6 41.844,105.236 41.844,104.176 Arduino_MEGA1.46
"pin 27": Arduino_MEGA1.44 JP?.7 | length 9.5
  Top Layer w0.5: JP?.7 44.384,105.236 44.384,104.176 Arduino_MEGA1.44
"pin 28": Arduino_MEGA1.42 JP?.8 | length 9.5
  Top Layer w0.5: JP?.8 46.924,105.236 46.924,104.176 Arduino_MEGA1.42
"RX mcu": Arduino_MEGA1.69 LED_RX1.1 U1.12 | length 28.6
  Top Layer w0.5: U1.12 v1(19,68.365) 21.665,68.365 Arduino_MEGA1.69 ; LED_RX1.1 15.958,52.958 v1(17.457,52.958)
  Bottom Layer w0.5: v1(17.457,52.958) 19,54.5 v1(19,68.365)
"TX mcu": Arduino_MEGA1.70 LED_TX1.1 U1.11 | length 20
  Top Layer w0.5: U1.11 17,67.095 ; LED_TX1.1 15.607,57.564 17,58.957 17,67.095 ; Arduino_MEGA1.70 22.935,67.095 17,67.095
Vin: 7809.3 "LED GREEN.1" "LED RED.1" Arduino_MEGA1.8 C2.1 C4.1 | length 119.1
  Top Layer w1: C2.1 56.051,38.5 62.04,32.511 7809.3 ; C4.1 69.9,30.77 68.17,32.5 7809.3 ; 83,83.5 85.5,81 85.5,43.5 84.3,42.3 82.84,42.3 82.54,42 82.5,41.96 82.5,38.586 81.914,38 76.586,38 76,38.586 76,49.7 Arduino_MEGA1.8 66.5,47.16 66.5,36.96 7809.3
pads on no net: Arduino_MEGA1.0 Arduino_MEGA1.1 Arduino_MEGA1.2 Arduino_MEGA1.3 Arduino_MEGA1.4 Arduino_MEGA1.5 Arduino_MEGA1.14 Arduino_MEGA1.16 Arduino_MEGA1.19 Arduino_MEGA1.20 Arduino_MEGA1.21 Arduino_MEGA1.22 Arduino_MEGA1.23 Arduino_MEGA1.24 Arduino_MEGA1.27 Arduino_MEGA1.29 Arduino_MEGA1.30 Arduino_MEGA1.32 Arduino_MEGA1.34 Arduino_MEGA1.36 Arduino_MEGA1.38 Arduino_MEGA1.40 Arduino_MEGA1.71 Arduino_MEGA1.72 Arduino_MEGA1.74 Arduino_MEGA1.75 Arduino_MEGA1.76 Arduino_MEGA1.80 Arduino_MEGA1.81 Arduino_MEGA1.82 Arduino_MEGA1.84 Arduino_MEGA1.85 Arduino_MEGA1.86 JP1.15 JP1.16 RL1.2 U1.7 U1.8 U1.9 U1.10

## Polygon pours and split planes (outlines as drawn)
GND on Top Layer "GND_L01_P000" (solid, remove dead copper, pour order 0): 0,0 91.5,0 91.5,139.5 0,139.5

## Keep-outs
Keep-Out Layer:
  lines w1: 41,134 34,134 34,117.5 41,117.5 41,134 ; 41,134 41,134 ; 86.5,133.5 86.5,117 79.5,117 79.5,133.5 86.5,133.5 ; 86.5,133.5 86.5,133.5 ; 0,0 0,139.5 91.5,139.5 91.5,0 0,0

## Other copper
Top Layer:
  text "VEROTECT V1.0" at 87,10.752 h3 r90

## Silkscreen, mask and mechanical layers (free items; w line width, h text height)
Top Overlay:
  text "+ ADC GND" at 76,97.5 h1.3
  text "+  -" at 85.5,88 h1.52 r180
  text "+ -" at 56,73.5 h1.2
  text "+ -" at 56,62 h1.2
  text "+ -" at 56,50.5 h1.2
  text "+ -" at 56,39.5 h1.2
  text "Tx Rx GND" at 6.5,38.5 h1
  text "+  -" at 84,37.5 h1.52 r180
  text "+  -" at 40.5,16.5 h1.52

## Text inside footprints (layer, text, board x,y; h text height)
Arduino_MEGA1: Top Overlay "AREF" at 26.292,31.336 h0.51 r315; Top Overlay "GND" at 26.292,33.876 h0.51 r315; Top Overlay "PWM13" at 26.292,36.416 h0.51 r315; Top Overlay "PWM12" at 26.292,38.956 h0.51 r315; Top Overlay "PWM11" at 26.292,41.496 h0.51 r315; Top Overlay "PWM10" at 26.292,44.036 h0.51 r315; Top Overlay "PWM9" at 26.292,46.576 h0.51 r315; Top Overlay "PWM8" at 26.292,49.116 h0.51 r315; Top Overlay "PWM7" at 26.345,53.18 h0.51 r315; Top Overlay "PWM6" at 26.345,55.72 h0.51 r315; Top Overlay "PWM5" at 26.345,58.26 h0.51 r315; Top Overlay "PWM4" at 26.345,60.8 h0.51 r315; Top Overlay "PWM3" at 26.345,63.34 h0.51 r315; Top Overlay "PWM2" at 26.165,65.88 h0.51 r315; Top Overlay "TX0" at 26.165,68.42 h0.51 r315; Top Overlay "TX3" at 26.165,76.04 h0.51 r315; Top Overlay "RX3" at 26.165,78.58 h0.51 r315; Top Overlay "TX2" at 26.165,81.12 h0.51 r315; Top Overlay "RX2" at 26.165,83.66 h0.51 r315; Top Overlay "TX1" at 26.165,86.2 h0.51 r315; Top Overlay "RX1" at 26.165,88.74 h0.51 r315; Top Overlay "SDA" at 26.165,91.28 h0.51 r315; Top Overlay "GND" at 68.075,105.885 h0.51 r135; Top Overlay "53" at 65.535,105.885 h0.51 r135; Top Overlay "51" at 62.995,105.885 h0.51 r135; Top Overlay "49" at 60.455,105.885 h0.51 r135; Top Overlay "47" at 57.915,105.885 h0.51 r135; Top Overlay "45" at 55.375,105.885 h0.51 r135; Top Overlay "43" at 52.835,105.885 h0.51 r135; Top Overlay "41" at 50.295,105.885 h0.51 r135; Top Overlay "39" at 47.755,105.885 h0.51 r135; Top Overlay "37" at 45.215,105.885 h0.51 r135; Top Overlay "35" at 42.675,105.885 h0.51 r135; Top Overlay "33" at 40.135,105.885 h0.51 r135; Top Overlay "31" at 37.595,105.885 h0.51 r135; Top Overlay "29" at 35.055,105.885 h0.51 r135; Top Overlay "27" at 32.515,105.885 h0.51 r135; Top Overlay "25" at 29.975,105.885 h0.51 r135; Top Overlay "23" at 27.435,105.885 h0.51 r135; Top Overlay "5V" at 24.895,105.885 h0.51 r135; Top Overlay "50" at 62.36,98.265 h0.51 r45; Top Overlay "GND" at 67.44,98.265 h0.51 r45; Top Overlay "52" at 64.9,98.265 h0.51 r45; Top Overlay "48" at 59.82,98.265 h0.51 r45; Top Overlay "46" at 57.28,98.265 h0.51 r45; Top Overlay "44" at 54.74,98.265 h0.51 r45; Top Overlay "42" at 52.2,98.265 h0.51 r45; Top Overlay "40" at 49.66,98.265 h0.51 r45; Top Overlay "38" at 47.12,98.265 h0.51 r45; Top Overlay "36" at 44.58,98.265 h0.51 r45; Top Overlay "34" at 42.04,98.265 h0.51 r45; Top Overlay "32" at 39.5,98.265 h0.51 r45; Top Overlay "30" at 36.96,98.265 h0.51 r45; Top Overlay "28" at 34.42,98.265 h0.51 r45; Top Overlay "26" at 31.88,98.265 h0.51 r45; Top Overlay "24" at 29.34,98.265 h0.51 r45; Top Overlay "22" at 26.8,98.265 h0.51 r45; Top Overlay "5V" at 24.26,98.265 h0.51 r45; Top Overlay "SCL" at 26.165,93.82 h0.51 r315; Top Overlay "RX0" at 26.165,70.96 h0.51 r315; Top Overlay "AD15" at 70.615,98.9 h0.51 r135; Top Overlay "AD14" at 70.615,96.36 h0.51 r135; Top Overlay "AD13" at 70.615,93.82 h0.51 r135; Top Overlay "AD12" at 70.615,91.28 h0.51 r135; Top Overlay "AD11" at 70.615,88.74 h0.51 r135; Top Overlay "AD10" at 70.615,86.2 h0.51 r135; Top Overlay "AD9" at 70.615,83.66 h0.51 r135; Top Overlay "AD8" at 70.615,81.12 h0.51 r135; Top Overlay "AD7" at 70.615,76.04 h0.51 r135; Top Overlay "AD6" at 70.615,73.5 h0.51 r135; Top Overlay "AD5" at 70.615,70.96 h0.51 r135; Top Overlay "AD4" at 70.615,68.42 h0.51 r135; Top Overlay "AD3" at 70.615,65.88 h0.51 r135; Top Overlay "AD2" at 70.615,63.34 h0.51 r135; Top Overlay "AD1" at 70.615,60.8 h0.51 r135; Top Overlay "AD0" at 70.615,58.26 h0.51 r135; Top Overlay "Vin" at 70.615,53.18 h0.51 r135; Top Overlay "GND" at 70.615,50.64 h0.51 r135; Top Overlay "GND" at 70.615,48.1 h0.51 r135; Top Overlay "5v" at 70.615,45.56 h0.51 r135; Top Overlay "3v3" at 70.615,43.02 h0.51 r135; Top Overlay "RESET" at 70.615,40.48 h0.51 r135; Top Overlay "IOREF" at 70.615,37.94 h0.51 r135
Buzzer1: Top Overlay "+" at 41.71,84.224 h1.52 r180